# Altium PCB BCM_ECU_revA.PcbDoc (part 3 of 4)
Units mm, origin at the board's own origin, x right, y up, seen from the top; angles counter-clockwise.
Board outline 224 x 100 mm, 4 copper layers (TOP SIG, GND, PWR, BOT SIG), stack 0.603 mm thick; 389 components, 400 nets, 1315 pads, 143 vias.
Unrouted connection lines stored in the file: 689.
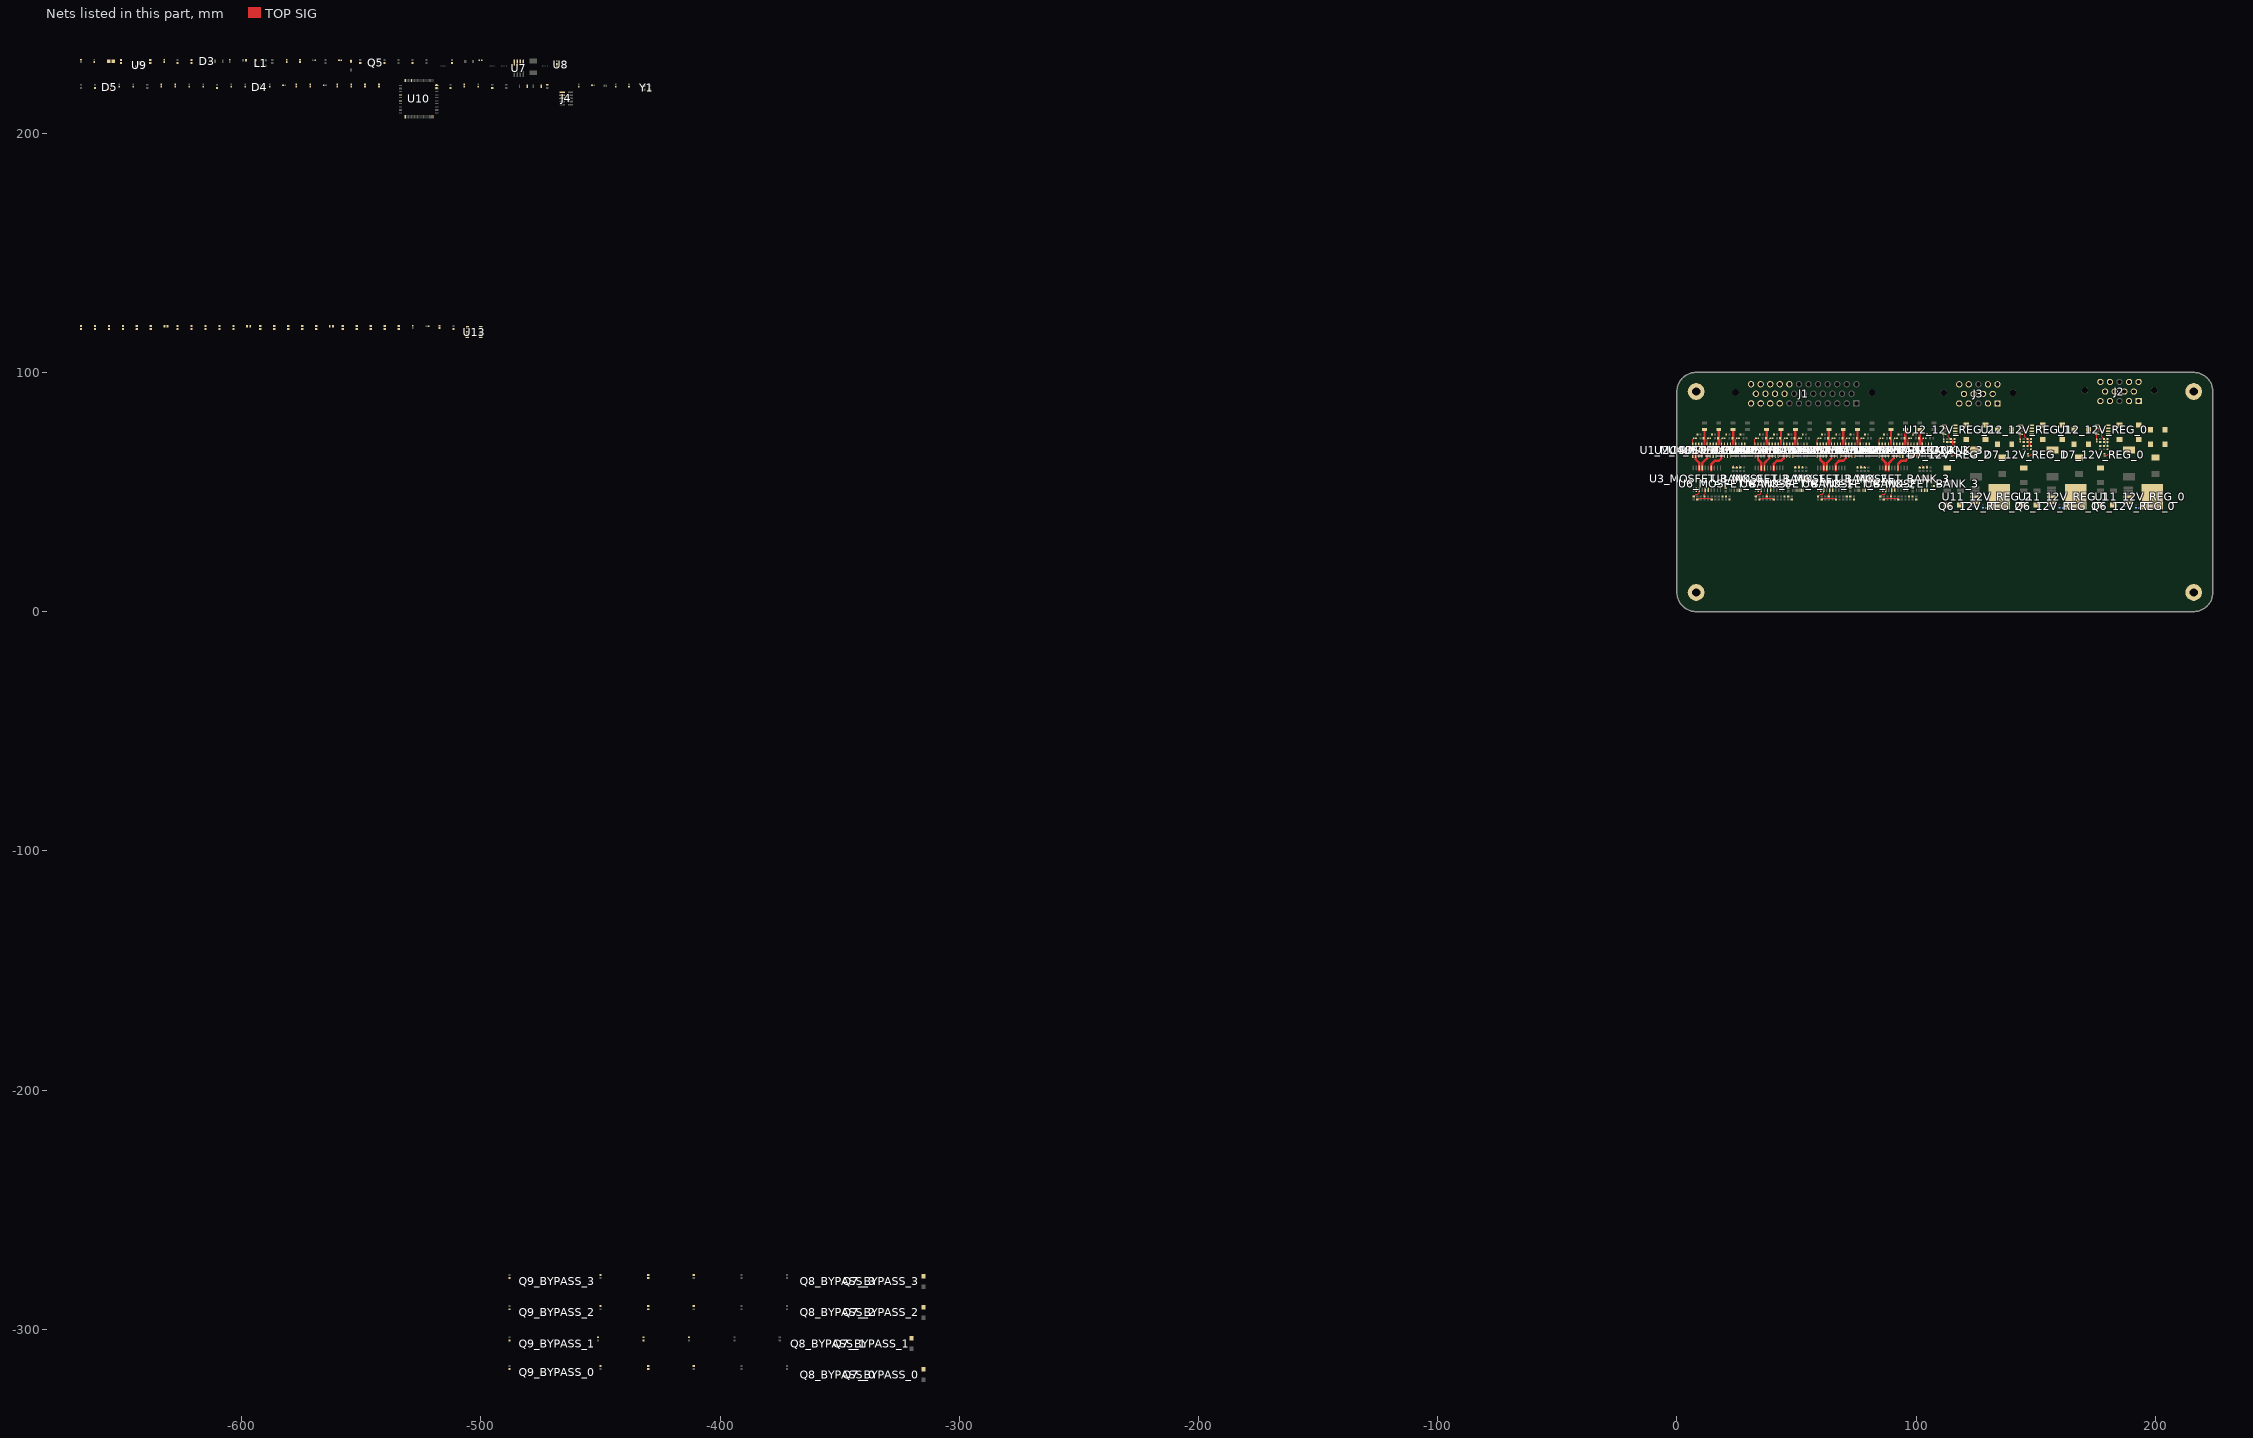
[diagram p2: the nets of this part, all layers, seen from the top]

## Via types
v1: diameter 0.5, hole 0.3, TOP SIG to BOT SIG, 143 vias

## Nets (pads, with @x,y where several pads share a name; then routed paths per layer and width w, separated by ;. In a path a pad name is that pad's centre, name@x,y a point inside that pad or via, vN(x,y) a via of type N, cw(c..) or ccw(c..) an arc to the next point about the centre after c; other vN are vias at no path point) (continued)
M2_OUT_MOSFET_BANK_0: (continued)
  TOP SIG w1: U2_MOSFET_BANK_0.4@16.405,65.184 16.405,67.405 17,68 17.5,68.5 F3_MOSFET_BANK_0.1@17.5,76.166
M2_OUT_MOSFET_BANK_1: F3_MOSFET_BANK_1.1 R21_MOSFET_BANK_1.2 U2_MOSFET_BANK_1.3 U2_MOSFET_BANK_1.4 | length 11.4
  TOP SIG w1: U2_MOSFET_BANK_1.4@42.405,65.184 42.405,67.405 43,68 43.5,68.5 F3_MOSFET_BANK_1.1@43.5,76.166
M2_OUT_MOSFET_BANK_2: F3_MOSFET_BANK_2.1 R21_MOSFET_BANK_2.2 U2_MOSFET_BANK_2.3 U2_MOSFET_BANK_2.4 | length 11.4
  TOP SIG w1: U2_MOSFET_BANK_2.4@68.405,65.184 68.405,67.405 69,68 69.5,68.5 F3_MOSFET_BANK_2.1@69.5,76.166
M2_OUT_MOSFET_BANK_3: F3_MOSFET_BANK_3.1 R21_MOSFET_BANK_3.2 U2_MOSFET_BANK_3.3 U2_MOSFET_BANK_3.4 | length 11.4
  TOP SIG w1: U2_MOSFET_BANK_3.4@94.405,65.184 94.405,67.405 95,68 95.5,68.5 F3_MOSFET_BANK_3.1@95.5,76.166
M2_PRE_SHUNT_MOSFET_BANK_0: U2_MOSFET_BANK_0.1 U2_MOSFET_BANK_0.2 U3_MOSFET_BANK_0.17 | length 7.9
  TOP SIG w1: 10.595,59.075 U3_MOSFET_BANK_0.17@10.595,60.05 10.595,62.095 12.595,64.095 U2_MOSFET_BANK_0.1@12.595,65.184 12.595,66.121
M2_PRE_SHUNT_MOSFET_BANK_1: U2_MOSFET_BANK_1.1 U2_MOSFET_BANK_1.2 U3_MOSFET_BANK_1.17 | length 7.9
  TOP SIG w1: 36.595,59.075 U3_MOSFET_BANK_1.17@36.595,60.05 36.595,62.095 38.595,64.095 U2_MOSFET_BANK_1.1@38.595,65.184 38.595,66.121
M2_PRE_SHUNT_MOSFET_BANK_2: U2_MOSFET_BANK_2.1 U2_MOSFET_BANK_2.2 U3_MOSFET_BANK_2.17 | length 7.9
  TOP SIG w1: 62.595,59.075 U3_MOSFET_BANK_2.17@62.595,60.05 62.595,62.095 64.595,64.095 U2_MOSFET_BANK_2.1@64.595,65.184 64.595,66.121
M2_PRE_SHUNT_MOSFET_BANK_3: U2_MOSFET_BANK_3.1 U2_MOSFET_BANK_3.2 U3_MOSFET_BANK_3.17 | length 7.9
  TOP SIG w1: 88.595,59.075 U3_MOSFET_BANK_3.17@88.595,60.05 88.595,62.095 90.595,64.095 U2_MOSFET_BANK_3.1@90.595,65.184 90.595,66.121
M2_TRIG_MOSFET_BANK_0: R3_MOSFET_BANK_0.2 U3_MOSFET_BANK_0.5 | length 3
  TOP SIG w0.3: R3_MOSFET_BANK_0.2@11.5,48.15 11.5,49 11.865,49.365 U3_MOSFET_BANK_0.5@11.865,50.95
M2_TRIG_MOSFET_BANK_1: R3_MOSFET_BANK_1.2 U3_MOSFET_BANK_1.5 | length 3
  TOP SIG w0.3: R3_MOSFET_BANK_1.2@37.5,48.15 37.5,49 37.865,49.365 U3_MOSFET_BANK_1.5@37.865,50.95
M2_TRIG_MOSFET_BANK_2: R3_MOSFET_BANK_2.2 U3_MOSFET_BANK_2.5 | length 3
  TOP SIG w0.3: R3_MOSFET_BANK_2.2@63.5,48.15 63.5,49 63.865,49.365 U3_MOSFET_BANK_2.5@63.865,50.95
M2_TRIG_MOSFET_BANK_3: R3_MOSFET_BANK_3.2 U3_MOSFET_BANK_3.5 | length 3
  TOP SIG w0.3: R3_MOSFET_BANK_3.2@89.5,48.15 89.5,49 89.865,49.365 U3_MOSFET_BANK_3.5@89.865,50.95
M3_I_SENSE: U7.7
M3_I_SENSE_MOSFET_BANK_0: R16_MOSFET_BANK_0.2 U4_MOSFET_BANK_0.7 | length 4.6
  TOP SIG w0.3: R16_MOSFET_BANK_0.2@26.5,60.15 v1(26.5,61) ; v1@19.865,68.189 U4_MOSFET_BANK_0.7@19.865,69.816 v1@19.865,68.189 ; v1@19.865,68.189 v1@20,68.054 ; v1@19.865,68.189 v1@20,68.054 ; v1@20,68.054 v1(20,68) v1@20,68.054
  other v1: 20,68
M3_I_SENSE_MOSFET_BANK_1: R16_MOSFET_BANK_1.2 U4_MOSFET_BANK_1.7 | length 4.6
  TOP SIG w0.3: R16_MOSFET_BANK_1.2@52.5,60.15 v1(52.5,61) ; v1@45.865,68.189 U4_MOSFET_BANK_1.7@45.865,69.816 v1@45.865,68.189 ; v1@45.865,68.189 v1@46,68.054 ; v1@45.865,68.189 v1@46,68.054 ; v1@46,68.054 v1(46,68) v1@46,68.054
  other v1: 46,68
M3_I_SENSE_MOSFET_BANK_2: R16_MOSFET_BANK_2.2 U4_MOSFET_BANK_2.7 | length 4.6
  TOP SIG w0.3: R16_MOSFET_BANK_2.2@78.5,60.15 v1(78.5,61) ; v1@71.865,68.189 v1@72,68.054 ; v1@71.865,68.189 U4_MOSFET_BANK_2.7@71.865,69.816 v1@71.865,68.189 ; v1@71.865,68.189 v1@72,68.054 ; v1@72,68.054 v1(72,68) v1@72,68.054
  other v1: 72,68
M3_I_SENSE_MOSFET_BANK_3: R16_MOSFET_BANK_3.2 U4_MOSFET_BANK_3.7 | length 4.6
  TOP SIG w0.3: R16_MOSFET_BANK_3.2@104.5,60.15 v1(104.5,61) ; v1@97.865,68.189 v1@98,68.054 ; v1@97.865,68.189 U4_MOSFET_BANK_3.7@97.865,69.816 v1@97.865,68.189 ; v1@97.865,68.189 v1@98,68.054 ; v1@98,68.054 v1(98,68) v1@98,68.054
  other v1: 98,68
M3_OUT_MOSFET_BANK_0: F4_MOSFET_BANK_0.1 R22_MOSFET_BANK_0.2 U4_MOSFET_BANK_0.3 U4_MOSFET_BANK_0.4 | length 11.4
  TOP SIG w1: U4_MOSFET_BANK_0.4@22.405,65.184 22.405,67.405 23,68 23.5,68.5 F4_MOSFET_BANK_0.1@23.5,76.166
M3_OUT_MOSFET_BANK_1: F4_MOSFET_BANK_1.1 R22_MOSFET_BANK_1.2 U4_MOSFET_BANK_1.3 U4_MOSFET_BANK_1.4 | length 11.4
  TOP SIG w1: U4_MOSFET_BANK_1.4@48.405,65.184 48.405,67.405 49,68 49.5,68.5 F4_MOSFET_BANK_1.1@49.5,76.166
M3_OUT_MOSFET_BANK_2: F4_MOSFET_BANK_2.1 R22_MOSFET_BANK_2.2 U4_MOSFET_BANK_2.3 U4_MOSFET_BANK_2.4 | length 11.4
  TOP SIG w1: U4_MOSFET_BANK_2.4@74.405,65.184 74.405,67.405 75,68 75.5,68.5 F4_MOSFET_BANK_2.1@75.5,76.166
M3_OUT_MOSFET_BANK_3: F4_MOSFET_BANK_3.1 R22_MOSFET_BANK_3.2 U4_MOSFET_BANK_3.3 U4_MOSFET_BANK_3.4 | length 11.4
  TOP SIG w1: U4_MOSFET_BANK_3.4@100.405,65.184 100.405,67.405 101,68 101.5,68.5 F4_MOSFET_BANK_3.1@101.5,76.166
M3_PRE_SHUNT_MOSFET_BANK_0: U3_MOSFET_BANK_0.14 U4_MOSFET_BANK_0.1 U4_MOSFET_BANK_0.2 | length 9.8
  TOP SIG w1: 14.405,59.075 U3_MOSFET_BANK_0.14@14.405,60.05 14.405,61.705 15.7,63 17.5,63 18.595,64.095 U4_MOSFET_BANK_0.1@18.595,65.184 18.595,66.121
M3_PRE_SHUNT_MOSFET_BANK_1: U3_MOSFET_BANK_1.14 U4_MOSFET_BANK_1.1 U4_MOSFET_BANK_1.2 | length 9.8
  TOP SIG w1: 40.405,59.075 U3_MOSFET_BANK_1.14@40.405,60.05 40.405,61.705 41.7,63 43.5,63 44.595,64.095 U4_MOSFET_BANK_1.1@44.595,65.184 44.595,66.121
M3_PRE_SHUNT_MOSFET_BANK_2: U3_MOSFET_BANK_2.14 U4_MOSFET_BANK_2.1 U4_MOSFET_BANK_2.2 | length 9.8
  TOP SIG w1: 66.405,59.075 U3_MOSFET_BANK_2.14@66.405,60.05 66.405,61.705 67.7,63 69.5,63 70.595,64.095 U4_MOSFET_BANK_2.1@70.595,65.184 70.595,66.121
M3_PRE_SHUNT_MOSFET_BANK_3: U3_MOSFET_BANK_3.14 U4_MOSFET_BANK_3.1 U4_MOSFET_BANK_3.2 | length 9.8
  TOP SIG w1: 92.405,59.075 U3_MOSFET_BANK_3.14@92.405,60.05 92.405,61.705 93.7,63 95.5,63 96.595,64.095 U4_MOSFET_BANK_3.1@96.595,65.184 96.595,66.121